# Altium PCB RCAuto.PcbDoc
Units mm, origin at the board's own origin, x right, y up, seen from the top; angles counter-clockwise.
Board outline 27 x 40 mm, 2 copper layers (Top Layer, Bottom Layer); 10 components, 10 nets, 93 pads, 8 vias.
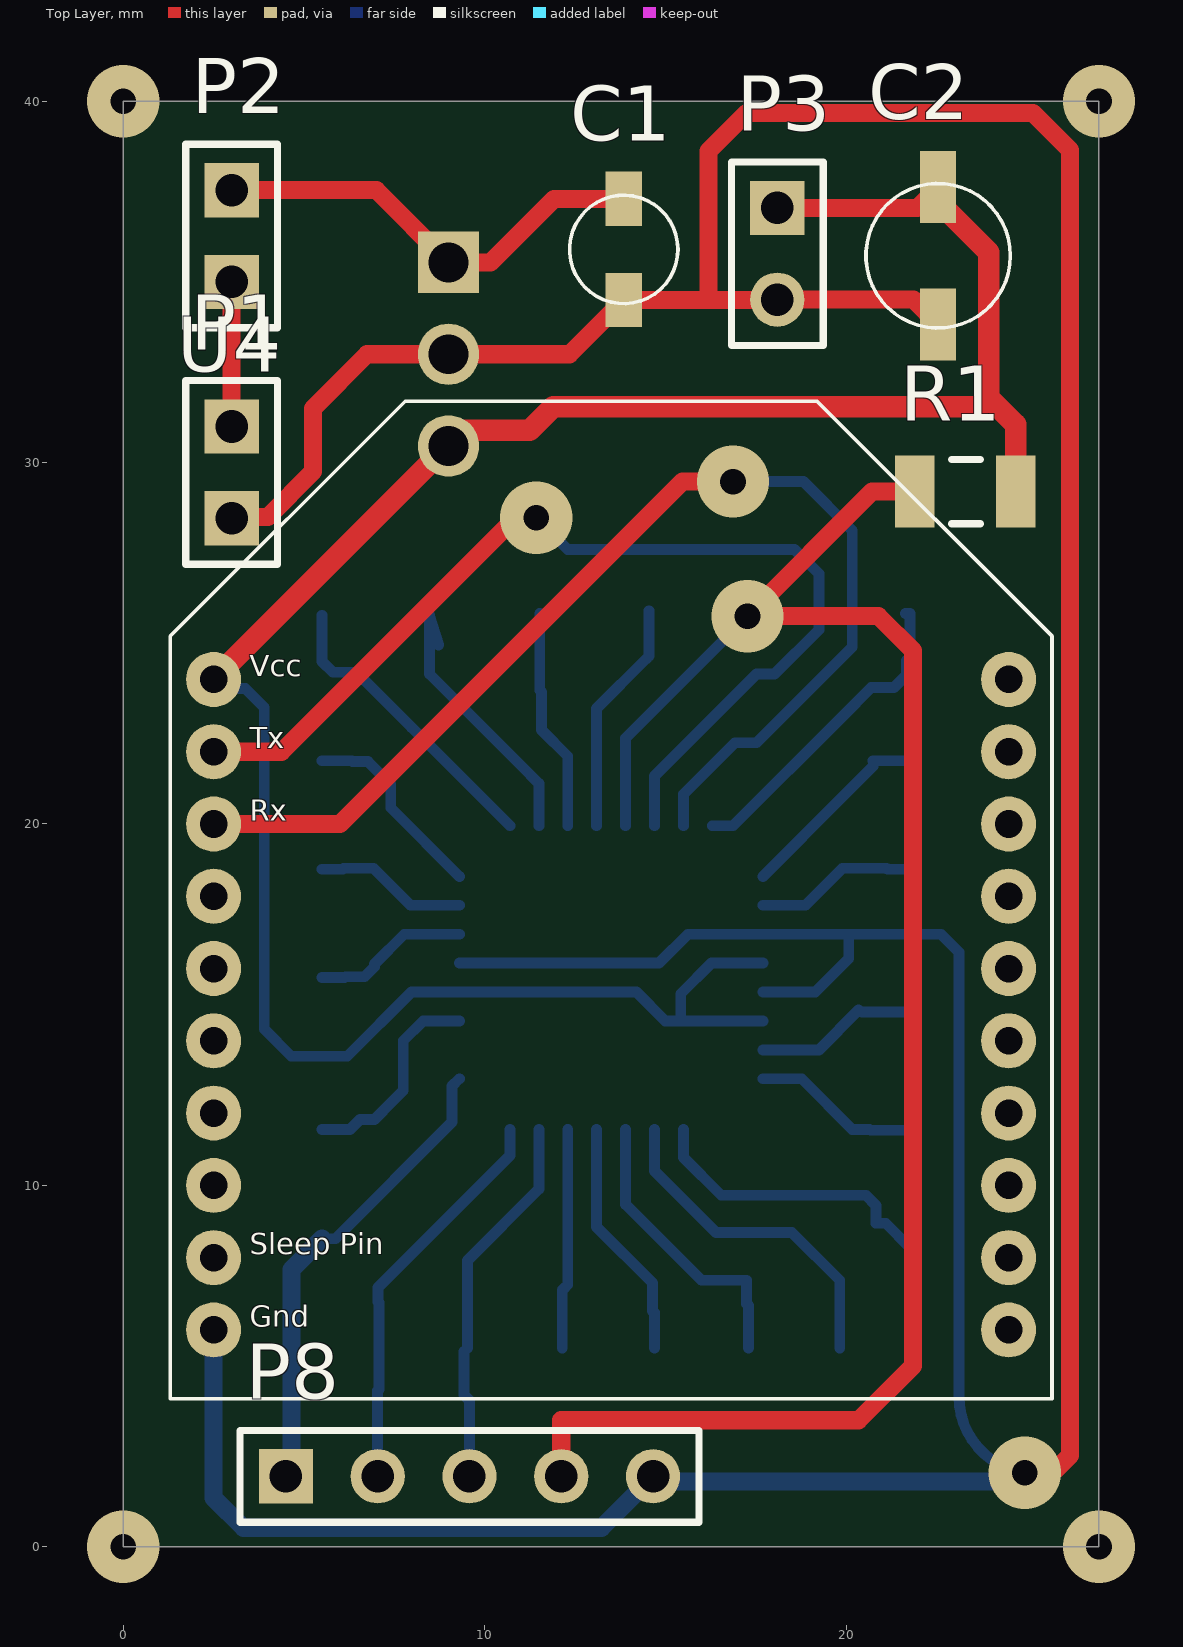
[diagram p0: Top Layer view]
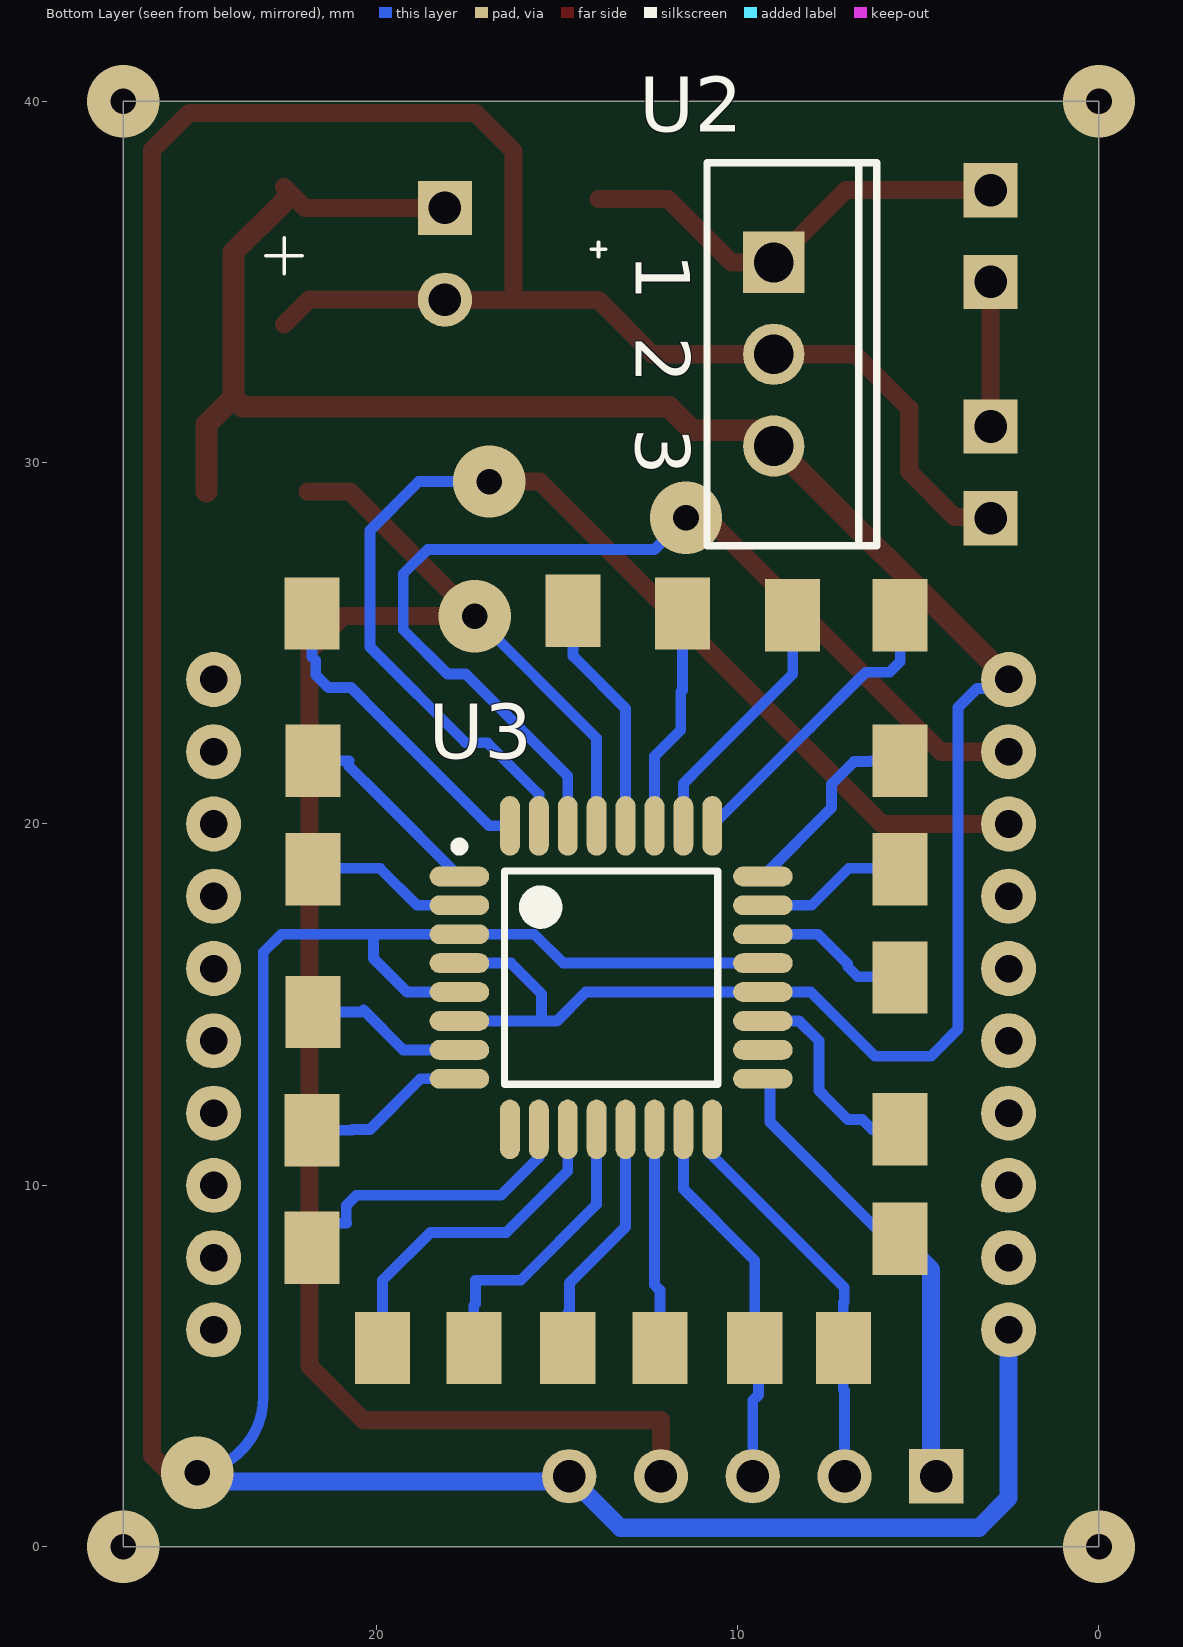
[diagram p1: Bottom Layer view, seen from below]

## Layer stack, top to bottom
Top Layer: signal copper 0.0356
Dielectric: core 0.32, FR-4, Dk 4.8
Bottom Layer: signal copper 0.0356

## Board outline
0,0 0,40 27,40 27,0

## Design rules (kind name [scope] priority, off if disabled: settings)
Clearance [All] p1: gap=0.1
PolygonConnect [All] p1: connectstyle=Relief reliefconductorwidth=0.254 reliefentries=4 polygonreliefangle="90 Angle"
RoomDefinition RCAuto [InComponentClass('RCAuto')] p1: confinementstyle=ConfineIn formatcopy=TRUE lockcomponents=FALSE outline 0,0 27,0 27,40 0,40
RoutingVias [All] p1: holewidth=0.711 width=2 viastyle="Through Hole" minholewidth=0.711 minwidth=1.5 maxholewidth=0.711 maxwidth=2
SilkscreenOverComponentPads [All] p1: minsilkscreentomaskgap=0.254
SolderMaskExpansion [All] p1: expansion=0.102
Width [All] p1: maxlimit=0.6 minlimit=0.3 preferedwidth=0.45
27 further rules are at their usual default settings.

## Components (designator, comment, footprint, x,y, rotation, side; value= is the part's Value field where it differs from the comment)
C1 "CapElectSMDd3mm" CapElectSMDd3mm 13.85,35.9 r0 top
C2 "CapElectSMDd4mm" CapElectSMDd4mm 22.55,35.725 r0 top
P1 "In VCC" HDR1X2#1 3,31 r270 top
P2 "Switch" HDR1X2#1 3,35 r90 top
P3 "DC Control-Reset" HDR1X2#2 18.1,37.05 r270 top
P8 "Phantom" HDR1X5 4.5,1.95 r0 top
R1 "Res3" 14-1206 23.3,29.2 r180 top
U2 "LF33CV" TO-220A 9,33 r270 bottom
U3 "ATmega8-16AC" 32A_N 13.5,15.75 r180 bottom
U4 "Xbee S1" "Xbee S1" 2.5,24 r0 top

## Footprints (in the part's own frame and the unit in brackets; to place one, negate y for a bottom-side part, rotate by r counter-clockwise, add the part's x,y. Pads: shape width x height; smd on the part's side, far side on the other; paste and mask are expansions set on the pad)
14-1206 [mm] "Chip Resistor, Body 3.2x1.6mm"
  rect 1.1x2 smd: 1(-1.397,0) 2(1.397,0)
  silkscreen extent -0.42,-0.89 0.38,0.89, body extent -1.67,-1.02 1.68,1.07, height 0.9
32A_N [mm] "Thin QFP, 32-Leads, Body 7x7mm, Pitch 0.8mm, IPC Medium Density"
  oval 1.65x0.55 smd: 1(-4.2,2.8) 2(-4.2,2) 3(-4.2,1.2) 4(-4.2,0.4) 5(-4.2,-0.4) 6(-4.2,-1.2) 7(-4.2,-2) 8(-4.2,-2.8) 17(4.2,-2.8) 18(4.2,-2) 19(4.2,-1.2) 20(4.2,-0.4) 21(4.2,0.4) 22(4.2,1.2) 23(4.2,2) 24(4.2,2.8)
  oval 0.55x1.65 smd: 9(-2.8,-4.2) 10(-2,-4.2) 11(-1.2,-4.2) 12(-0.4,-4.2) 13(0.4,-4.2) 14(1.2,-4.2) 15(2,-4.2) 16(2.8,-4.2) 25(2.8,4.2) 26(2,4.2) 27(1.2,4.2) 28(0.4,4.2) 29(-0.4,4.2) 30(-1.2,4.2) 31(-2,4.2) 32(-2.8,4.2)
  silkscreen extent -4.33,-2.95 2.95,3.75, body extent -3.5,-3.5 3.5,3.5, height 1.2
CapElectSMDd3mm [mm] "Capacitor electrolitico superficial Diametro 3mm AG"
  rect 1x1.5 smd: 1(0,1.4) 2(0,-1.4)
  silkscreen extent -1.5,-1.5 1.5,1.5
CapElectSMDd4mm [mm] "Capacitor electrolitico superficial Diametro 4mm AG"
  rect 1x2 smd: 1(0,1.9)
  rect 1x2 smd mask+0.102: 2(0,-1.9)
  silkscreen extent -2,-2 2,2
HDR1X2#1 [mm] "Connector; Header; 2 Position"
  rect 1.5x1.5 hole 0.9: 1(0,0) 2(2.54,0)
  silkscreen extent -1.27,-1.27 3.81,1.27
HDR1X2#2 [mm] "Connector; Header; 2 Position"
  rect 1.5x1.5 hole 0.9: 1(0,0)
  round 1.5 hole 0.9: 2(2.54,0)
  silkscreen extent -1.27,-1.27 3.81,1.27
HDR1X5 [mm] "Connector; Header; 5 Position"
  rect 1.5x1.5 hole 0.9: 1(0,0)
  round 1.5 hole 0.9: 2(2.54,0) 3(5.08,0) 4(7.62,0) 5(10.16,0)
  silkscreen extent -1.27,-1.27 11.43,1.27
TO-220A [mm] "TO, Thru-Hole, Vertical, Heatsink Mounted; 3 In-Line Leads; Pitch 2.54 mm"
  rect 1.7x1.7 hole 1.1: 1(-2.54,0)
  round 1.7 hole 1.1: 2(0,0) 3(2.54,0)
  silkscreen extent -5.3,-1.85 5.3,2.85
"Xbee S1" [mil]
  round 60 hole 30: 1(0,0) 2(0,-78.74) 3(0,-157.48) 4(0,-236.22) 5(0,-314.96) 6(0,-393.7) 7(0,-472.44) 8(0,-551.18) 9(0,-629.92) 10(0,-708.66) 11(866.14,-708.66) 12(866.14,-629.92) 13(866.14,-551.18) 14(866.14,-472.44) 15(866.14,-393.7) 16(866.14,-314.96) 17(866.14,-236.22) 18(866.14,-157.48) 19(866.14,-78.74) 20(866.14,0)
  silkscreen extent -47,-783 913,303

## Part data
P1 P2 P3: library part "Header 2", "Header, 2-Pin"
P8: library part "Header 5", "Header, 5-Pin"
R1: "Resistor"
U2: "500mA, Very Low Drop (0.45V) Voltage Regulator"
U3: "8-Bit AVR Microcontroller with 8K Bytes of In-System Programmable Flash Memory"

## Free pads (board coordinates)
  rect 1.524x2 smd far side: 4(21.775,25.825) 5(14.55,25.9) 6(11.525,25.825) 7(8.475,25.775) 8(5.5,25.775) 9(5.5,21.75) 10(5.5,18.75) 11(5.5,15.75) 12(5.5,11.55) 13(5.5,8.525) 14(21.75,21.75) 15(21.75,18.75) 16(21.75,14.8) 17(21.775,11.525) 18(7.075,5.5) 19(9.525,5.5) 20(12.15,5.5) 21(14.7,5.5) 22(17.3,5.5) 23(19.825,5.5) 24(21.775,8.275)

## Via types
v1: diameter 2, hole 0.711, Top Layer to Bottom Layer, 8 vias

## Nets (pads, with @x,y where several pads share a name; then routed paths per layer and width w, separated by ;. In a path a pad name is that pad's centre, name@x,y a point inside that pad or via, vN(x,y) a via of type N, cw(c..) or ccw(c..) an arc to the next point about the centre after c; other vN are vias at no path point)
GND: C1.2 C2.2 P1.2 P3.2 P8.5 U2.2 U3.3 U3.5 U3.21 U4.10 | length 137.1
  Top Layer w0.5: P1.2 3.04,28.5 4,28.5 5.25,29.75 5.25,31.5 6.75,33 U2.2 12.35,33 C1.2 16.2,34.5 ; P3.2@18.09,34.5 16.2,34.5 ; P3.2 21.865,34.51 C2.2 ; v1@25.675,2 26.2,2.525 26.2,38.65 25.175,39.675 17.25,39.675 16.2,38.625 16.2,34.5
  Bottom Layer w0.3: U3.21 14.825,16.15 15.625,16.95 U3.3 20.075,16.95 ; U3.5 19.15,15.35 20.075,16.275 20.075,16.95 ; v1@25.575,2.025 25.25,2.025 cw(c25.25,4.15) 24.947,2.047 cw(c25.25,4.15) 23.125,4.15 23.125,16.45 22.625,16.95 20.075,16.95
  Bottom Layer w0.5: U4.10 2.5,1.35 3.325,0.525 13.235,0.525 P8.5 ; P8.5@14.66,1.8 24.7,1.8 24.947,2.047 v1(24.95,2.05)
NetC1_1: C1.1 P2.2 U2.1 | length 12.4
  Top Layer w0.5: P2.2 7,37.54 U2.1 10.165,35.54 11.925,37.3 C1.1
NetP1_1: P1.1 P2.1 | length 4
  Top Layer w0.5: P1.1 P2.1
NetP8_1: P8.1 pad.13 U3.17 | length 13.2
  Bottom Layer w0.3: pad.13 5.875,8.525 9.1,11.75 9.1,12.75 U3.17
  Bottom Layer w0.5: P8.1 4.65,2.1 4.65,7.675 pad.13
NetP8_2: P8.2 pad.18 U3.16 | length 11.2
  Bottom Layer w0.3: P8.2@7.04,1.8 7.04,4.315 ; 7.05,6.775 7.05,7.175 10.7,10.825 U3.16 ; 7.075,4.35 pad.18 7.075,6.75
NetP8_3: P8.3 pad.19 U3.15 | length 10.5
  Bottom Layer w0.3: pad.19@9.425,5.4 9.425,4.2 9.58,4.045 P8.3@9.58,1.8 ; pad.19 9.525,7.925 11.5,9.9 U3.15
NetP8_4: P8.4 R1.2 U3.29 | length 50.1
  Top Layer w0.5: P8.4@12.12,1.8 12.12,3.5 20.35,3.5 21.85,5 21.85,24.8 20.9,25.75 v1(17.275,25.75) 20.725,29.2 R1.2
  Bottom Layer w0.3: U3.29 13.9,22.375 v1(17.275,25.75)
NetU3_30: U3.30 U4.2 | length 29.2
  Top Layer w0.3: v1@10.85,28.475 v1(11.425,28.475)
  Top Layer w0.5: U4.2 4.375,22 v1@10.85,28.475
  Bottom Layer w0.3: v1(11.425,28.475) 12.3,27.6 18.575,27.6 19.25,26.925 19.25,25.375 18.025,24.15 17.525,24.15 14.7,21.325 U3.30
NetU3_31: U3.31 U4.3 | length 32.6
  Top Layer w0.5: U4.3 6,20 15.475,29.475 v1(16.875,29.475)
  Bottom Layer w0.3: U3.31 15.5,20.825 16.925,22.25 17.525,22.25 20.175,24.9 20.175,28.125 18.85,29.45 ; v1(16.875,29.475) 18.825,29.475
VCC3.3: C2.1 P3.1 R1.1 U2.3 U3.4 U3.6 U3.20 U4.1 | length 67.5
  Top Layer w0.5: P3.1 21.975,37.05 C2.1
  Top Layer w0.6: U4.1 9.4,30.9 11.25,30.9 11.9,31.55 23.7,31.55 23.95,31.8 ; C2.1@22.55,37.225 23.95,35.825 23.95,31.8 ; R1.1 24.697,31.053 23.95,31.8
  Bottom Layer w0.3: U4.1 2.75,23.75 3.375,23.75 3.9,23.225 3.9,14.325 4.65,13.575 6.2,13.575 7.975,15.35 U3.20 14.2,15.35 15,14.55 15.425,14.55 ; U3.6 15.425,14.55 ; U3.4 16.275,16.15 15.425,15.3 15.425,14.55
pads on no net: U3.1 U3.2 U3.7 U3.8 U3.9 U3.10 U3.11 U3.12 U3.13 U3.14 U3.18 U3.19 U3.22 U3.23 U3.24 U3.25 U3.26 U3.27 U3.28 U3.32 U4.4 U4.5 U4.6 U4.7 U4.8 U4.9 U4.11 U4.12 U4.13 U4.14 U4.15 U4.16 U4.17 U4.18 U4.19 U4.20
copper on no net: | length 114.8
  Bottom Layer w0.3: 5.5,11.55 6.275,11.55 6.55,11.825 6.95,11.825 7.467,12.342 7.75,12.625 7.75,14 8.3,14.55 9.3,14.55 ; 5.5,15.75 6.125,15.75 6.15,15.775 6.675,15.775 6.95,16.05 6.95,16.125 7.775,16.95 9.3,16.95 ; 5.5,18.75 6.075,18.75 ; 5.5,21.75 6.325,21.75 ; 5.5,25.775 5.5,24.675 5.5,24.5 5.8,24.2 6.45,24.2 6.6,24.05 7.975,22.675 10.7,19.95 ; 6.1,18.775 6.55,18.775 6.925,18.775 7.95,17.75 9.3,17.75 ; 6.35,21.725 6.775,21.725 7.4,21.1 7.4,20.45 9.3,18.55 ; 8.475,24.15 8.475,25.775 8.725,24.95 ; 8.55,24.075 11,21.625 11.5,21.125 11.5,19.95 ; 11.525,23.7 11.525,25.825 ; 11.575,23.65 11.575,23.275 11.575,22.6 12.3,21.875 12.3,19.95 ; 12.15,5.5 12.15,6.75 12.15,7.1 ; 12.2,7.15 12.3,7.25 12.3,11.55 ; 13.1,11.55 13.1,9.95 13.1,8.85 14.65,7.3 14.65,6.9 14.65,6.525 ; 13.1,19.95 13.1,21.75 13.1,23.2 14.475,24.575 ; 13.9,11.55 13.9,10.15 13.9,9.475 16,7.375 17.25,7.375 17.25,6.725 ; 14.55,24.65 14.55,25.9 ; 14.7,5.5 14.7,6.475 ; 14.7,11.55 14.7,10.4 16.4,8.7 18.5,8.7 19.825,7.375 19.825,6.9 19.825,6.5 19.825,5.5 ; 15.5,11.55 15.5,10.775 16.55,9.725 20.55,9.725 20.83,9.445 20.83,8.955 ; 16.3,19.95 16.875,19.95 19.9,22.975 20.7,23.775 21.325,23.775 21.675,24.125 21.675,24.525 ; 17.3,5.5 17.3,6.675 ; 17.7,12.95 18.775,12.95 20.175,11.55 20.65,11.55 ; 17.7,13.75 19.25,13.75 20.35,14.85 ; 17.7,17.75 18.875,17.75 19.9,18.775 20.725,18.775 21.125,18.775 ; 17.7,18.55 19.925,20.775 20.75,21.6 ; 20.45,14.8 20.75,14.8 21.75,14.8 ; 20.675,11.525 21.775,11.525 ; 20.75,21.75 21.75,21.75 ; 20.825,8.95 21.1,8.95 21.775,8.275 ; 21.15,18.75 21.75,18.75 ; 21.65,25.825 21.775,25.825 21.775,24.625
  other v1: 0,0 27,0 0,40 27,40

## Text inside footprints (layer, text, board x,y; h text height)
U2: Bottom Overlay "1" at 12.825,35.79 h1.5 r90; Bottom Overlay "2" at 12.825,33.5 h1.5 r90; Bottom Overlay "3" at 12.825,30.96 h1.5 r90
U4: Top Overlay "Gnd" at 3.5,5.9 h1; Top Overlay "Vcc" at 3.5,23.9 h1; Top Overlay "Tx" at 3.5,21.9 h1; Top Overlay "Rx" at 3.5,19.9 h1; Top Overlay "Sleep Pin" at 3.5,7.9 h1